# EAGLE board ludusProtoShieldWireless_Panel_v11 (EAGLE 7.3.0), part 1 of 2
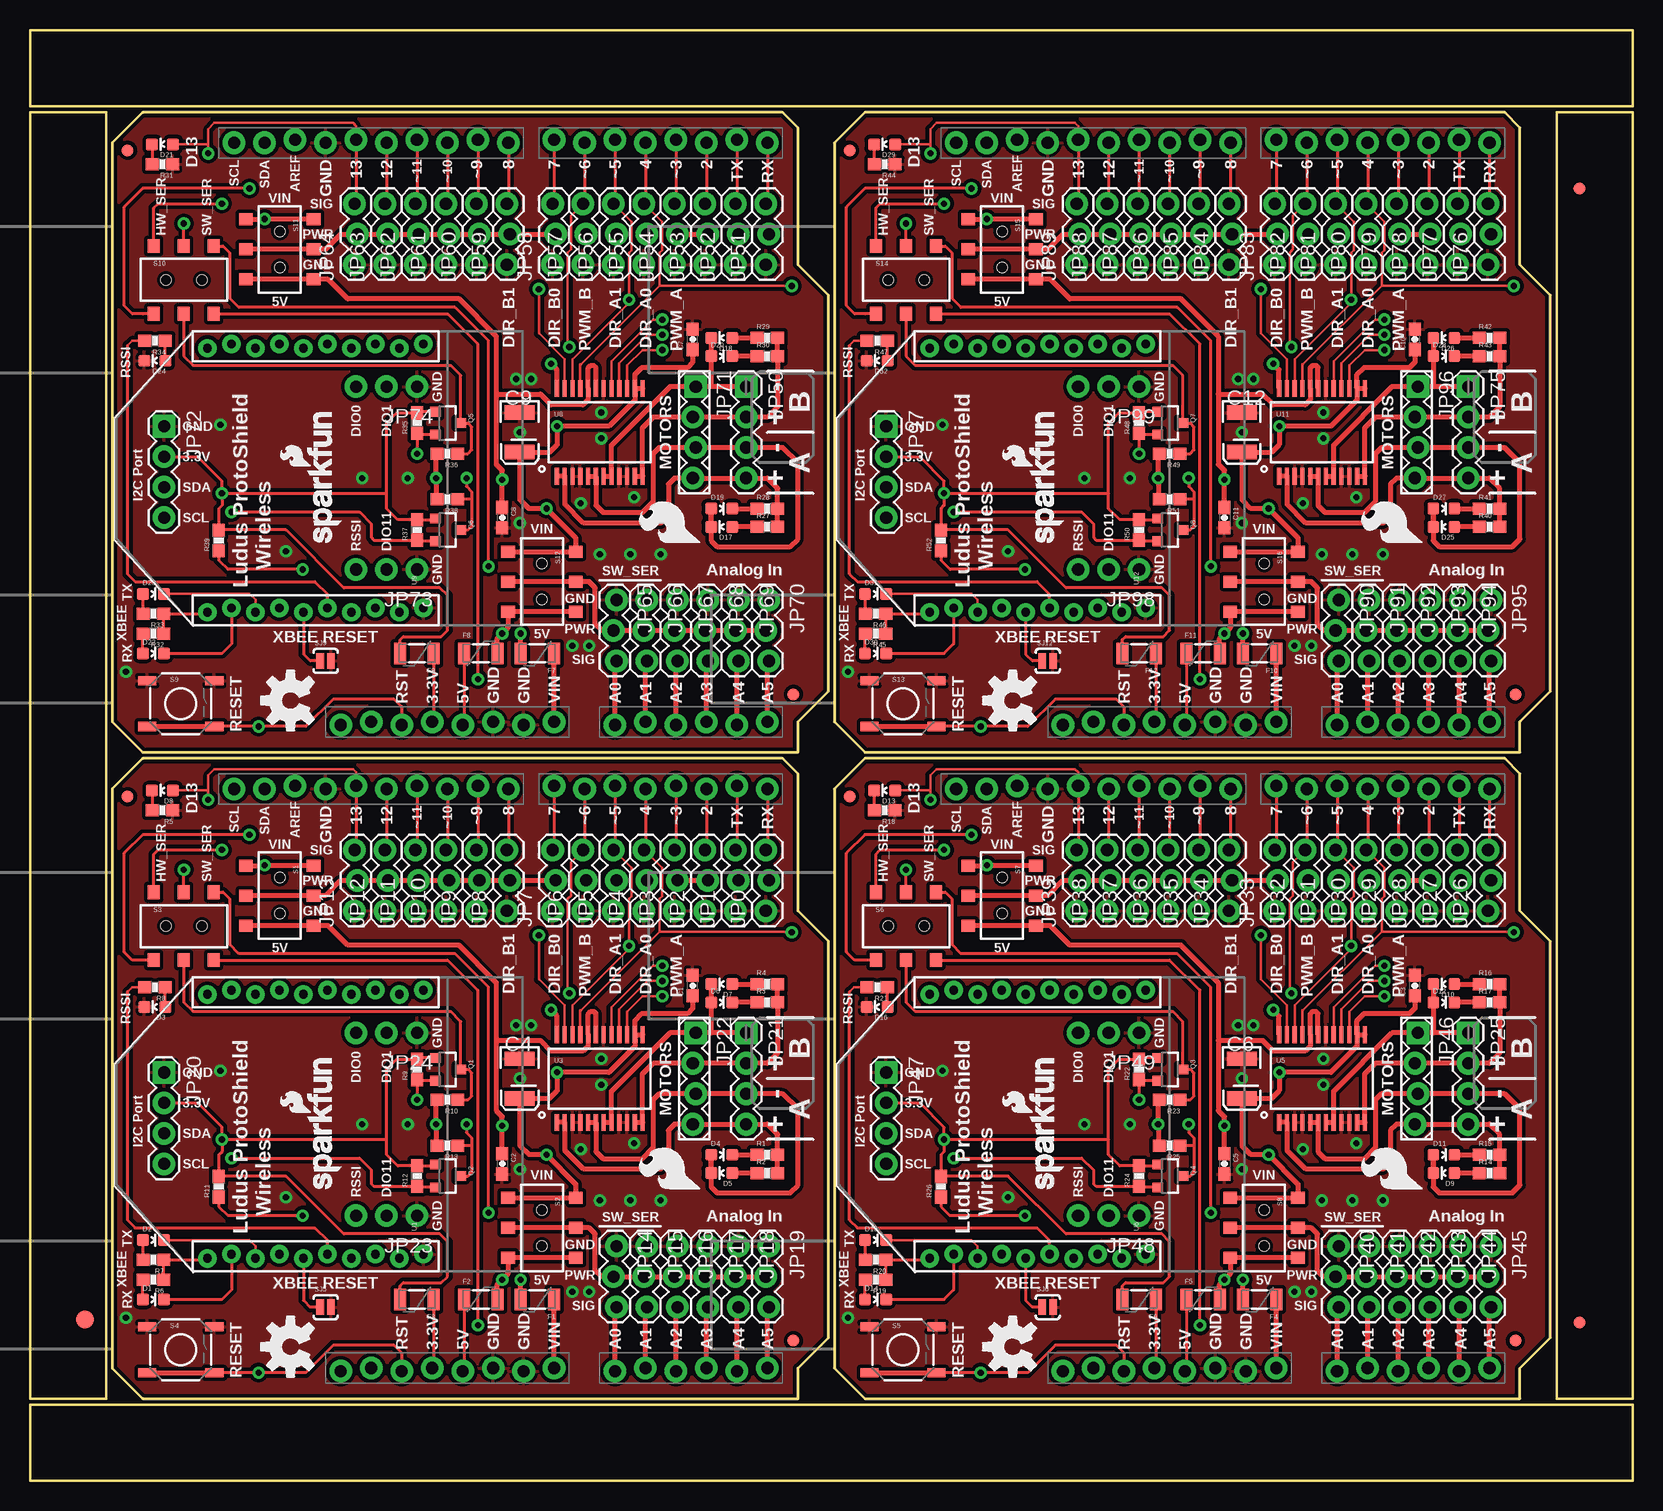
[diagram p0: board, top side]
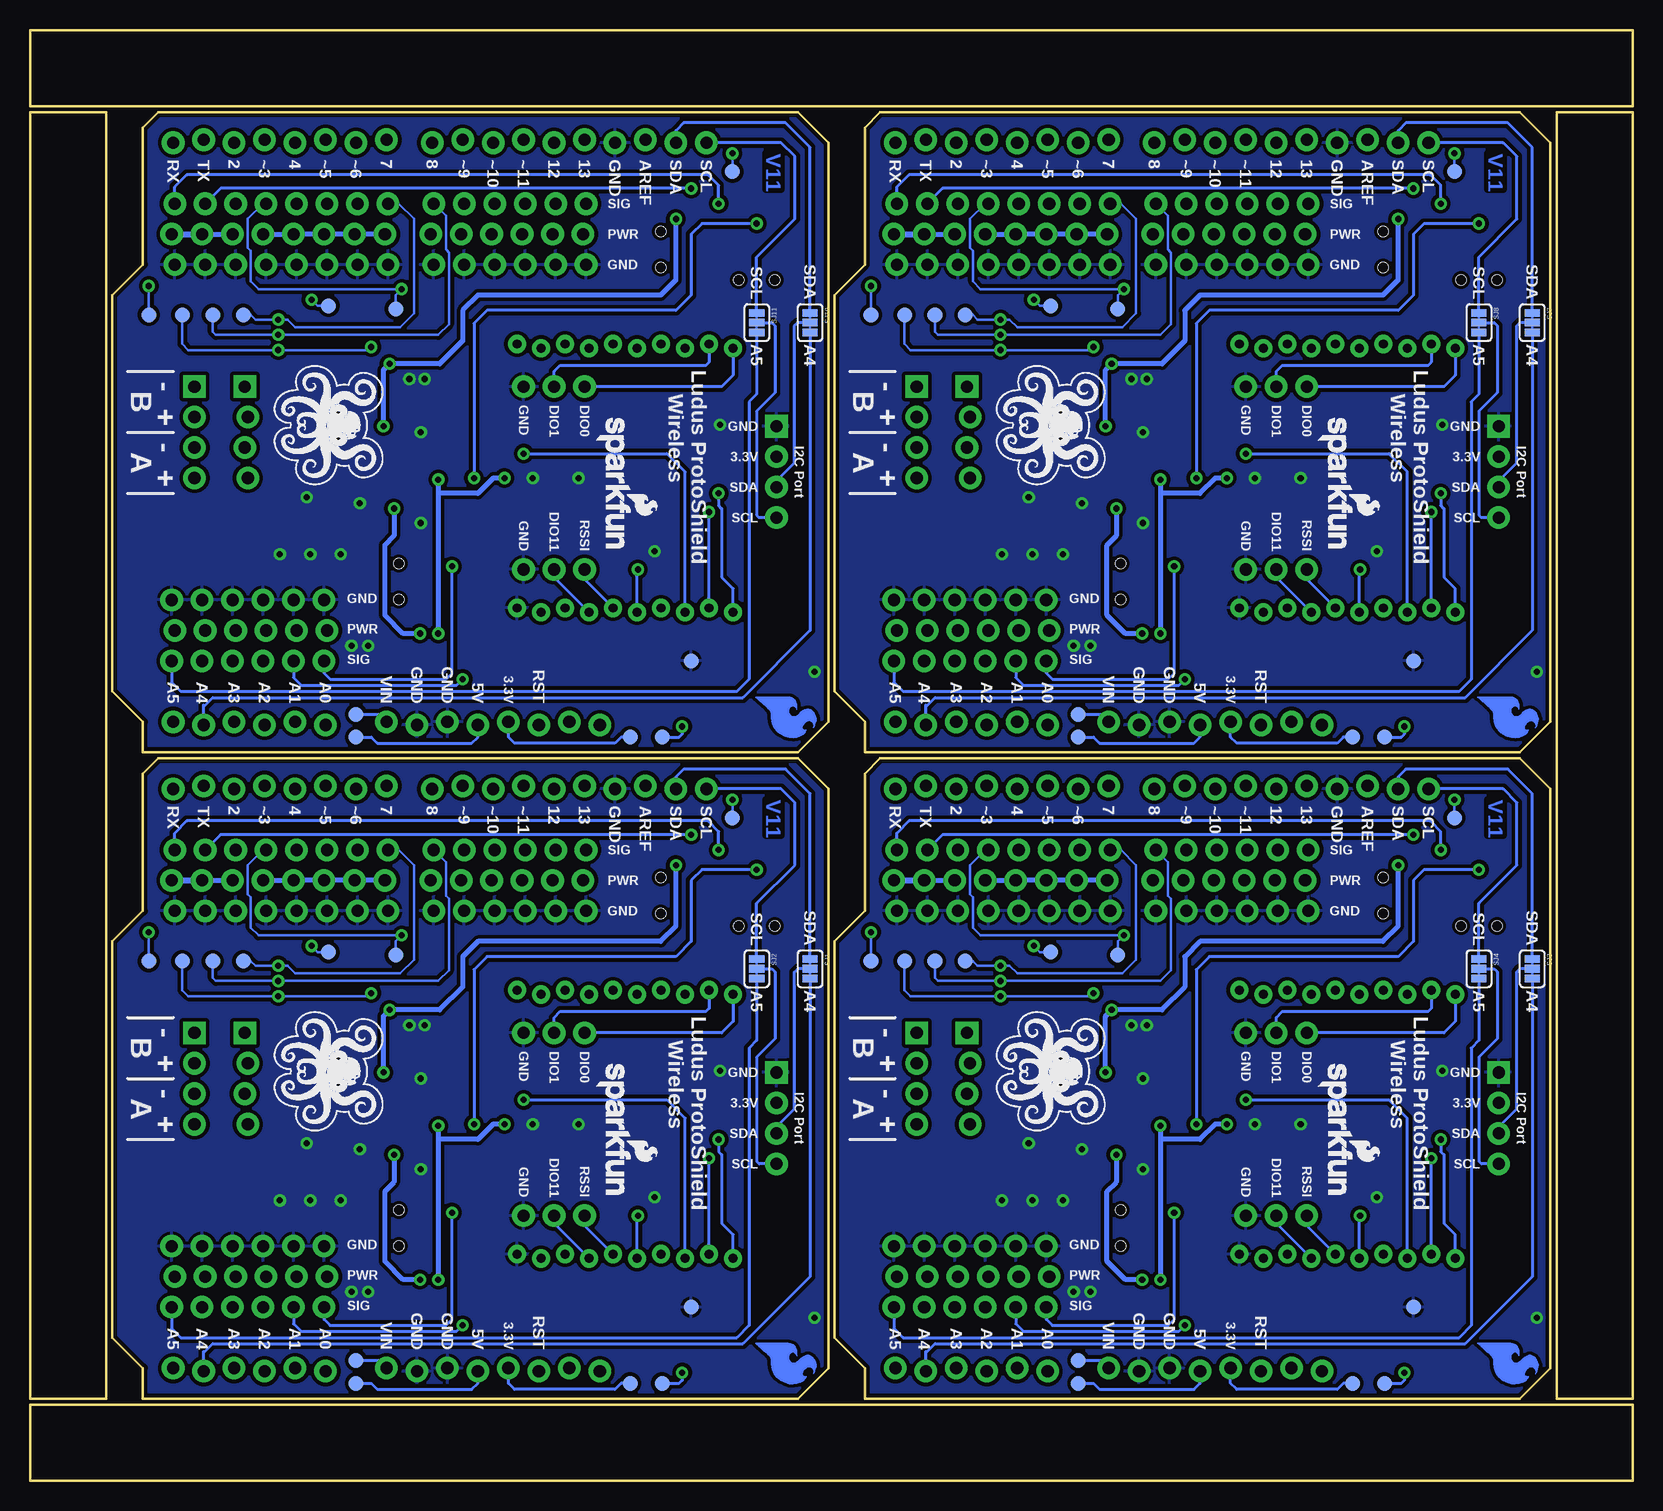
[diagram p1: board, bottom side, seen from below]

Size 133.6 x 120.9 mm. Coordinates in mm from the lower left corner, seen from the top.
Outline: 6.86,57.66 6.86,9.4 9.4,6.86 64.01,6.86 64.01,9.4 66.55,11.94 66.55,44.96 64.01,47.5 64.01,58.93 62.74,60.2 9.4,60.2 6.86,57.66
Outline: 67.06,57.66 67.06,9.4 69.6,6.86 124.21,6.86 124.21,9.4 126.75,11.94 126.75,44.96 124.21,47.5 124.21,58.93 122.94,60.2 69.6,60.2 67.06,57.66
Outline: 6.86,111.51 6.86,63.25 9.4,60.71 64.01,60.71 64.01,63.25 66.55,65.79 66.55,98.81 64.01,101.35 64.01,112.78 62.74,114.05 9.4,114.05 6.86,111.51
Outline: 67.06,111.51 67.06,63.25 69.6,60.71 124.21,60.71 124.21,63.25 126.75,65.79 126.75,98.81 124.21,101.35 124.21,112.78 122.94,114.05 69.6,114.05 67.06,111.51
Outline: 6.35,6.86 6.35,114.05 0,114.05 0,6.86 6.35,6.86
Outline: 0,0 133.6,0 133.6,6.35 0,6.35 0,0
Outline: 133.6,6.86 133.6,114.05 127.25,114.05 127.25,6.86 133.6,6.86
Outline: 133.6,120.9 0,120.9 0,114.55 133.6,114.55 133.6,120.9
Copper layers (1*16): Top 0.035mm / dielectric 1.5mm / Bottom 0.035mm
Design rules "SparkFun-2-layer": minimum track width 7mil, minimum drill 15mil, track to track 8mil, track to pad 8mil, pad to pad 8mil, via to via 8mil, smd to smd 8mil, copper to edge 8mil, drill to drill 8mil, minimum pad ring 12mil, minimum via ring 10mil, stop-mask expansion 4mil, vias tented up to drill 20mil, thermal gap 10mil
Net classes: 1 vcc: width 0.305 mm

## Footprints (pad centres in the part's own frame; a part is rotated, then mirrored left to right if it is on the bottom)
0603-CAP = smd 1.1 x 1: 1 -0.85,0; 2 0.85,0
EIA3528 = smd 1.2 x 2.5: A 1.65,0; C -1.65,0
LED-0603 = smd 1 x 1: A 0,-0.877; C 0,0.877
FIDUCIAL-1.5X3 = smd 1.5 x 1.5: 1 0,0
FIDUCIAL-1X2 = smd 1 x 1: 1 0,0
PTC-1206 = smd 1 x 1.8: 1 -1.4,0; 2 1.4,0
1X03_LOCK = drill 1.016 pad 1.88: 1 0,0.127; 2 2.54,-0.127; 3 5.08,0.127
1X04 = drill 1.016 pad 1.88 square: 1 0,0 | drill 1.016 pad 1.88: 2 2.54,0; 3 5.08,0; 4 7.62,0
1X04_LOCK = drill 1.016 pad 1.88 square: 1 0,0.127 | drill 1.016 pad 1.88: 2 2.54,-0.127; 3 5.08,0.127; 4 7.62,-0.127
1X03_NO_SILK = drill 1.016 pad 1.88: 1 0,0; 2 2.54,0; 3 5.08,0
SOT23-3 = smd 0.8 x 0.9: 1 -0.95,-1; 2 0.95,-1; 3 0,1.1
0603-RES = smd 1.1 x 1: 1 -0.85,0; 2 0.85,0
AYZ0202 = smd 1 x 1.15: 1 -2.5,2.825; 2 0,2.825; 3 2.5,2.825; 4 -2.5,-2.825; 5 0,-2.825; 6 2.5,-2.825 | hole 0.85: 1.5,0; -1.5,0
TACTILE-SWITCH-SMD = smd 1.524 x 0.762: 1 -2.794,1.905; 2 2.794,1.905; 3 -2.794,-1.905; 4 2.794,-1.905
PAD-JUMPER-3-3OF3_NC_BY_TRACE_YES_SILK_FULL_BOX = smd 0.635 x 1.27: 1 -0.813,0; 2 0,0; 3 0.813,0
SJ_2S-NO = smd 0.635 x 1.27: 1 -0.45,0; 2 0.45,0
PAD.03X.05 = smd 1.27 x 1.27: P$1 0,0
XBEE-1_LOCK = drill 0.737 pad 1.524: 1 -11.178,20; 2 -10.822,18; 3 -11.178,16; 4 -10.822,14; 5 -11.178,12; 6 -10.822,10; 7 -11.178,8; 8 -10.822,6; 9 -11.178,4; 10 -10.822,2; 11 11.178,2; 12 10.822,4; 13 11.178,6; 14 10.822,8; 15 11.178,10; 16 10.822,12; 17 11.178,14; 18 10.822,16; 19 11.178,18; 20 10.822,20
UNO_R3_SHIELD_NOLABELS_LOCK = drill 1.016 pad 1.88: 3.3V 50.8,26.67; 5V 51.054,29.21; A0 51.054,41.91; A1 50.8,44.45; A2 51.054,46.99; A3 50.8,49.53; A4 51.054,52.07; A5 50.8,54.61; AREF 2.286,15.24; D2 2.54,49.53; D3 2.286,46.99; D4 2.54,44.45; D5 2.286,41.91; D6 2.54,39.37; D7 2.286,36.83; D8 2.54,33.02; D9 2.286,30.48; D10 2.54,27.94; D11 2.286,25.4; D12 2.54,22.86; D13 2.286,20.32; GND@0 50.8,31.75; GND@1 51.054,34.29; GND@2 2.54,17.78; IOREF 50.8,21.59; NC 51.054,19.05; RES 51.054,24.13; RX 2.54,54.61; SCL 2.54,10.16; SDA 2.54,12.7; TX 2.286,52.07; VIN 50.8,36.83
SSOP24 = smd 0.348 x 1.397: 1 -3.575,-3.656; 2 -2.925,-3.656; 3 -2.275,-3.656; 4 -1.625,-3.656; 5 -0.975,-3.656; 6 -0.325,-3.656; 7 0.325,-3.656; 8 0.975,-3.656; 9 1.625,-3.656; 10 2.275,-3.656; 11 2.925,-3.656; 12 3.575,-3.656; 13 3.575,3.656; 14 2.925,3.656; 15 2.275,3.656; 16 1.625,3.656; 17 0.975,3.656; 18 0.325,3.656; 19 -0.325,3.656; 20 -0.975,3.656; 21 -1.625,3.656; 22 -2.275,3.656; 23 -2.925,3.656; 24 -3.575,3.656

## Placement (x,y rotation side)
C1  0.1uF  [0603-CAP]  55.24,41.27 90 top
C2  0.1uF  [0603-CAP]  39.37,26.42 270 top
C3  0.1uF  [0603-CAP]  115.44,41.27 90 top
C4  10uf , 20V  [EIA3528]  40.83,33.53 270 top
C5  0.1uF  [0603-CAP]  99.57,26.42 270 top
C6  10uf , 20V  [EIA3528]  101.03,33.53 270 top
C7  0.1uF  [0603-CAP]  55.24,95.12 90 top
C8  0.1uF  [0603-CAP]  39.37,80.26 270 top
C9  10uf , 20V  [EIA3528]  40.83,87.38 270 top
C10  0.1uF  [0603-CAP]  115.44,95.12 90 top
C11  0.1uF  [0603-CAP]  99.57,80.26 270 top
C12  10uf , 20V  [EIA3528]  101.03,87.38 270 top
D1  Red  [LED-0603]  10.29,15.11 270 top
D2  Green  [LED-0603]  10.29,20.07 270 top
D3  Yellow  [LED-0603]  10.41,39.5 90 top
D4  Blue  [LED-0603]  57.66,27.18 270 top
D5  Yellow  [LED-0603]  57.66,25.65 90 top
D6  Blue  [LED-0603]  57.66,39.88 270 top
D7  Yellow  [LED-0603]  57.66,41.4 90 top
D8  Blue  [LED-0603]  11.05,57.53 90 top
D9  Yellow  [LED-0603]  117.86,25.65 90 top
D10  Yellow  [LED-0603]  117.86,41.4 90 top
D11  Blue  [LED-0603]  117.86,27.18 270 top
D12  Blue  [LED-0603]  117.86,39.88 270 top
D13  Blue  [LED-0603]  71.25,57.53 90 top
D14  Red  [LED-0603]  70.48,15.11 270 top
D15  Green  [LED-0603]  70.48,20.07 270 top
D16  Yellow  [LED-0603]  70.61,39.5 90 top
D17  Yellow  [LED-0603]  57.66,79.5 90 top
D18  Yellow  [LED-0603]  57.66,95.25 90 top
D19  Blue  [LED-0603]  57.66,81.03 270 top
D20  Blue  [LED-0603]  57.66,93.73 270 top
D21  Blue  [LED-0603]  11.05,111.38 90 top
D22  Red  [LED-0603]  10.29,68.96 270 top
D23  Green  [LED-0603]  10.29,73.91 270 top
D24  Yellow  [LED-0603]  10.41,93.34 90 top
D25  Yellow  [LED-0603]  117.86,79.5 90 top
D26  Yellow  [LED-0603]  117.86,95.25 90 top
D27  Blue  [LED-0603]  117.86,81.03 270 top
D28  Blue  [LED-0603]  117.86,93.73 270 top
D29  Blue  [LED-0603]  71.25,111.38 90 top
D30  Red  [LED-0603]  70.48,68.96 270 top
D31  Green  [LED-0603]  70.48,73.91 270 top
D32  Yellow  [LED-0603]  70.61,93.34 90 top
E$1  [FIDUCIAL-1.5X3]  4.57,13.46 0 top
E$4  [FIDUCIAL-1X2]  129.16,13.21 0 top
E$5  [FIDUCIAL-1X2]  129.16,107.7 180 top
F1  [PTC-1206]  42.29,15.11 180 top
F2  [PTC-1206]  37.59,15.11 0 top
F3  [PTC-1206]  32.26,15.11 180 top
F4  [PTC-1206]  102.49,15.11 180 top
F5  [PTC-1206]  97.79,15.11 0 top
F6  [PTC-1206]  92.46,15.11 180 top
F7  [PTC-1206]  42.29,68.96 180 top
F8  [PTC-1206]  37.59,68.96 0 top
F9  [PTC-1206]  32.26,68.96 180 top
F10  [PTC-1206]  102.49,68.96 180 top
F11  [PTC-1206]  97.79,68.96 0 top
F12  [PTC-1206]  92.46,68.96 180 top
FID1  FIDUCIAL1X2  [FIDUCIAL-1X2]  8.13,57.02 0 top
FID2  FIDUCIAL1X2  [FIDUCIAL-1X2]  63.63,11.68 0 top
FID3  FIDUCIAL1X2  [FIDUCIAL-1X2]  68.33,57.02 0 top
FID4  FIDUCIAL1X2  [FIDUCIAL-1X2]  123.83,11.68 0 top
FID5  FIDUCIAL1X2  [FIDUCIAL-1X2]  8.13,110.87 0 top
FID6  FIDUCIAL1X2  [FIDUCIAL-1X2]  63.63,65.53 0 top
FID7  FIDUCIAL1X2  [FIDUCIAL-1X2]  68.33,110.87 0 top
FID8  FIDUCIAL1X2  [FIDUCIAL-1X2]  123.83,65.53 0 top
JP0  D0  [1X03_LOCK]  61.47,47.5 90 top
JP1  D1  [1X03_LOCK]  58.93,47.5 90 top
JP2  D2  [1X03_LOCK]  56.39,47.5 90 top
JP3  D3  [1X03_LOCK]  53.85,47.5 90 top
JP4  D4  [1X03_LOCK]  51.31,47.5 90 top
JP5  D5  [1X03_LOCK]  48.77,47.5 90 top
JP6  D6  [1X03_LOCK]  46.23,47.5 90 top
JP7  D7  [1X03_LOCK]  43.69,47.5 90 top
JP8  D8  [1X03_LOCK]  39.88,47.5 90 top
JP9  D9  [1X03_LOCK]  37.34,47.5 90 top
JP10  D10  [1X03_LOCK]  34.8,47.5 90 top
JP11  D11  [1X03_LOCK]  32.26,47.5 90 top
JP12  D12  [1X03_LOCK]  29.72,47.5 90 top
JP13  D13  [1X03_LOCK]  27.18,47.5 90 top
JP14  A0  [1X03_LOCK]  48.77,19.56 270 top
JP15  A1  [1X03_LOCK]  51.31,19.56 270 top
JP16  A2  [1X03_LOCK]  53.85,19.56 270 top
JP17  A3  [1X03_LOCK]  56.39,19.56 270 top
JP18  A4  [1X03_LOCK]  58.93,19.56 270 top
JP19  A5  [1X03_LOCK]  61.47,19.56 270 top
JP20  [1X04]  11.18,34.04 270 top
JP21  [1X04]  59.69,37.34 270 top
JP22  [1X04_LOCK]  55.37,37.34 270 top
JP23  [1X03_NO_SILK]  32.26,22.1 180 top
JP24  [1X03_NO_SILK]  32.26,37.34 180 top
JP25  [1X04]  119.89,37.34 270 top
JP26  D0  [1X03_LOCK]  121.67,47.5 90 top
JP27  D1  [1X03_LOCK]  119.13,47.5 90 top
JP28  D2  [1X03_LOCK]  116.59,47.5 90 top
JP29  D3  [1X03_LOCK]  114.05,47.5 90 top
JP30  D4  [1X03_LOCK]  111.51,47.5 90 top
JP31  D5  [1X03_LOCK]  108.97,47.5 90 top
JP32  D6  [1X03_LOCK]  106.43,47.5 90 top
JP33  D7  [1X03_LOCK]  103.89,47.5 90 top
JP34  D8  [1X03_LOCK]  100.08,47.5 90 top
JP35  D9  [1X03_LOCK]  97.54,47.5 90 top
JP36  D10  [1X03_LOCK]  95,47.5 90 top
JP37  D11  [1X03_LOCK]  92.46,47.5 90 top
JP38  D12  [1X03_LOCK]  89.92,47.5 90 top
JP39  D13  [1X03_LOCK]  87.38,47.5 90 top
JP40  A0  [1X03_LOCK]  108.97,19.56 270 top
JP41  A1  [1X03_LOCK]  111.51,19.56 270 top
JP42  A2  [1X03_LOCK]  114.05,19.56 270 top
JP43  A3  [1X03_LOCK]  116.59,19.56 270 top
JP44  A4  [1X03_LOCK]  119.13,19.56 270 top
JP45  A5  [1X03_LOCK]  121.67,19.56 270 top
JP46  [1X04_LOCK]  115.57,37.34 270 top
JP47  [1X04]  71.37,34.04 270 top
JP48  [1X03_NO_SILK]  92.46,22.1 180 top
JP49  [1X03_NO_SILK]  92.46,37.34 180 top
JP50  [1X04]  59.69,91.19 270 top
JP51  D0  [1X03_LOCK]  61.47,101.35 90 top
JP52  D1  [1X03_LOCK]  58.93,101.35 90 top
JP53  D2  [1X03_LOCK]  56.39,101.35 90 top
JP54  D3  [1X03_LOCK]  53.85,101.35 90 top
JP55  D4  [1X03_LOCK]  51.31,101.35 90 top
JP56  D5  [1X03_LOCK]  48.77,101.35 90 top
JP57  D6  [1X03_LOCK]  46.23,101.35 90 top
JP58  D7  [1X03_LOCK]  43.69,101.35 90 top
JP59  D8  [1X03_LOCK]  39.88,101.35 90 top
JP60  D9  [1X03_LOCK]  37.34,101.35 90 top
JP61  D10  [1X03_LOCK]  34.8,101.35 90 top
JP62  D11  [1X03_LOCK]  32.26,101.35 90 top
JP63  D12  [1X03_LOCK]  29.72,101.35 90 top
JP64  D13  [1X03_LOCK]  27.18,101.35 90 top
JP65  A0  [1X03_LOCK]  48.77,73.41 270 top
JP66  A1  [1X03_LOCK]  51.31,73.41 270 top
JP67  A2  [1X03_LOCK]  53.85,73.41 270 top
JP68  A3  [1X03_LOCK]  56.39,73.41 270 top
JP69  A4  [1X03_LOCK]  58.93,73.41 270 top
JP70  A5  [1X03_LOCK]  61.47,73.41 270 top
JP71  [1X04_LOCK]  55.37,91.19 270 top
JP72  [1X04]  11.18,87.88 270 top
JP73  [1X03_NO_SILK]  32.26,75.95 180 top
JP74  [1X03_NO_SILK]  32.26,91.19 180 top
JP75  [1X04]  119.89,91.19 270 top
JP76  D0  [1X03_LOCK]  121.67,101.35 90 top
JP77  D1  [1X03_LOCK]  119.13,101.35 90 top
JP78  D2  [1X03_LOCK]  116.59,101.35 90 top
JP79  D3  [1X03_LOCK]  114.05,101.35 90 top
JP80  D4  [1X03_LOCK]  111.51,101.35 90 top
JP81  D5  [1X03_LOCK]  108.97,101.35 90 top
JP82  D6  [1X03_LOCK]  106.43,101.35 90 top
JP83  D7  [1X03_LOCK]  103.89,101.35 90 top
JP84  D8  [1X03_LOCK]  100.08,101.35 90 top
JP85  D9  [1X03_LOCK]  97.54,101.35 90 top
JP86  D10  [1X03_LOCK]  95,101.35 90 top
JP87  D11  [1X03_LOCK]  92.46,101.35 90 top
JP88  D12  [1X03_LOCK]  89.92,101.35 90 top
JP89  D13  [1X03_LOCK]  87.38,101.35 90 top
JP90  A0  [1X03_LOCK]  108.97,73.41 270 top
JP91  A1  [1X03_LOCK]  111.51,73.41 270 top
JP92  A2  [1X03_LOCK]  114.05,73.41 270 top
JP93  A3  [1X03_LOCK]  116.59,73.41 270 top
JP94  A4  [1X03_LOCK]  119.13,73.41 270 top
JP95  A5  [1X03_LOCK]  121.67,73.41 270 top
JP96  [1X04_LOCK]  115.57,91.19 270 top
JP97  [1X04]  71.37,87.88 270 top
JP98  [1X03_NO_SILK]  92.46,75.95 180 top
JP99  [1X03_NO_SILK]  92.46,91.19 180 top
LOGO1  OSHW-LOGOM  [OSHW-LOGO-M]  21.72,11.18 90 top
LOGO2  SFE_LOGO_NAME_FLAME.1_INCH  [SFE_LOGO_NAME_FLAME_.1]  26.04,23.88 90 top
LOGO3  SFE_LOGO_FLAME.2_INCH  [SFE_LOGO_FLAME_.2]  56.13,24 90 top
LOGO4  SFE_LOGO_NAME_FLAME.1_INCH  [SFE_LOGO_NAME_FLAME_.1]  26.29,35.18 270 bottom
LOGO5  SFE_LOGO_FLAME.2COP  [SFE_LOGO_FLAME_COPPER_.2]  13.21,11.81 270 bottom
LOGO6  OSHW-LOGOM  [OSHW-LOGO-M]  81.92,11.18 90 top
LOGO7  SFE_LOGO_NAME_FLAME.1_INCH  [SFE_LOGO_NAME_FLAME_.1]  86.23,23.88 90 top
LOGO8  SFE_LOGO_FLAME.2_INCH  [SFE_LOGO_FLAME_.2]  116.33,24 90 top
LOGO9  SFE_LOGO_NAME_FLAME.1_INCH  [SFE_LOGO_NAME_FLAME_.1]  86.49,35.18 270 bottom
LOGO10  SFE_LOGO_FLAME.2COP  [SFE_LOGO_FLAME_COPPER_.2]  73.41,11.81 270 bottom
LOGO11  OSHW-LOGOM  [OSHW-LOGO-M]  21.72,65.02 90 top
LOGO12  SFE_LOGO_NAME_FLAME.1_INCH  [SFE_LOGO_NAME_FLAME_.1]  26.04,77.72 90 top
LOGO13  SFE_LOGO_FLAME.2_INCH  [SFE_LOGO_FLAME_.2]  56.13,77.85 90 top
LOGO14  SFE_LOGO_NAME_FLAME.1_INCH  [SFE_LOGO_NAME_FLAME_.1]  26.29,89.03 270 bottom
LOGO15  SFE_LOGO_FLAME.2COP  [SFE_LOGO_FLAME_COPPER_.2]  13.21,65.66 270 bottom
LOGO16  OSHW-LOGOM  [OSHW-LOGO-M]  81.92,65.02 90 top
LOGO17  SFE_LOGO_NAME_FLAME.1_INCH  [SFE_LOGO_NAME_FLAME_.1]  86.23,77.72 90 top
LOGO18  SFE_LOGO_FLAME.2_INCH  [SFE_LOGO_FLAME_.2]  116.33,77.85 90 top
LOGO19  SFE_LOGO_NAME_FLAME.1_INCH  [SFE_LOGO_NAME_FLAME_.1]  86.49,89.03 270 bottom
LOGO20  SFE_LOGO_FLAME.2COP  [SFE_LOGO_FLAME_COPPER_.2]  73.41,65.66 270 bottom
Q1  MOSFET-NCHANNELBSS138  [SOT23-3]  34.8,34.29 270 top
Q2  MOSFET-NCHANNELBSS138  [SOT23-3]  34.8,25.4 270 top
Q3  MOSFET-NCHANNELBSS138  [SOT23-3]  95,34.29 270 top
Q4  MOSFET-NCHANNELBSS138  [SOT23-3]  95,25.4 270 top
Q5  MOSFET-NCHANNELBSS138  [SOT23-3]  34.8,88.14 270 top
Q6  MOSFET-NCHANNELBSS138  [SOT23-3]  34.8,79.25 270 top
Q7  MOSFET-NCHANNELBSS138  [SOT23-3]  95,88.14 270 top
Q8  MOSFET-NCHANNELBSS138  [SOT23-3]  95,79.25 270 top
R1  1K  [0603-RES]  61.47,27.18 0 top
R2  1K  [0603-RES]  61.47,25.65 0 top
R3  1K  [0603-RES]  61.47,39.88 0 top
R4  1K  [0603-RES]  61.47,41.4 0 top
R5  330  [0603-RES]  11.05,55.88 180 top
R6  1K  [0603-RES]  10.29,16.76 180 top
R7  1K  [0603-RES]  10.29,18.41 180 top
R8  1K  [0603-RES]  10.41,41.15 180 top
R9  1K  [0603-RES]  32.26,34.29 90 top
R10  1K  [0603-RES]  34.8,31.75 180 top
R11  1K  [0603-RES]  15.75,24.51 90 top
R12  1K  [0603-RES]  32.26,25.4 90 top
R13  1K  [0603-RES]  34.8,27.94 180 top
R14  1K  [0603-RES]  121.67,25.65 0 top
R15  1K  [0603-RES]  121.67,27.18 0 top
R16  1K  [0603-RES]  121.67,41.4 0 top
R17  1K  [0603-RES]  121.67,39.88 0 top
R18  330  [0603-RES]  71.25,55.88 180 top
R19  1K  [0603-RES]  70.48,16.76 180 top
R20  1K  [0603-RES]  70.48,18.41 180 top
R21  1K  [0603-RES]  70.61,41.15 180 top
R22  1K  [0603-RES]  92.46,34.29 90 top
R23  1K  [0603-RES]  95,31.75 180 top
R24  1K  [0603-RES]  92.46,25.4 90 top
R25  1K  [0603-RES]  95,27.94 180 top
R26  1K  [0603-RES]  75.95,24.51 90 top
R27  1K  [0603-RES]  61.47,79.5 0 top
R28  1K  [0603-RES]  61.47,81.03 0 top
R29  1K  [0603-RES]  61.47,95.25 0 top
R30  1K  [0603-RES]  61.47,93.73 0 top
R31  330  [0603-RES]  11.05,109.73 180 top
R32  1K  [0603-RES]  10.29,70.61 180 top
R33  1K  [0603-RES]  10.29,72.26 180 top
R34  1K  [0603-RES]  10.41,95 180 top
R35  1K  [0603-RES]  32.26,88.14 90 top
R36  1K  [0603-RES]  34.8,85.6 180 top
R37  1K  [0603-RES]  32.26,79.25 90 top
R38  1K  [0603-RES]  34.8,81.79 180 top
R39  1K  [0603-RES]  15.75,78.36 90 top
R40  1K  [0603-RES]  121.67,79.5 0 top
R41  1K  [0603-RES]  121.67,81.03 0 top
R42  1K  [0603-RES]  121.67,95.25 0 top
R43  1K  [0603-RES]  121.67,93.73 0 top
R44  330  [0603-RES]  71.25,109.73 180 top
R45  1K  [0603-RES]  70.48,70.61 180 top
R46  1K  [0603-RES]  70.48,72.26 180 top
R47  1K  [0603-RES]  70.61,95 180 top
R48  1K  [0603-RES]  92.46,88.14 90 top
R49  1K  [0603-RES]  95,85.6 180 top
R50  1K  [0603-RES]  92.46,79.25 90 top
R51  1K  [0603-RES]  95,81.79 180 top
R52  1K  [0603-RES]  75.95,78.36 90 top
S1  [AYZ0202]  20.83,48.77 270 top
S2  [AYZ0202]  42.67,21.08 270 top
S3  DPDT  [AYZ0202]  12.83,46.23 0 top
S4  RESET  [TACTILE-SWITCH-SMD]  12.57,10.92 0 top
S5  RESET  [TACTILE-SWITCH-SMD]  72.77,10.92 0 top
S6  DPDT  [AYZ0202]  73.03,46.23 0 top
S7  [AYZ0202]  81.03,48.77 270 top
S8  [AYZ0202]  102.87,21.08 270 top
S9  RESET  [TACTILE-SWITCH-SMD]  12.57,64.77 0 top
S10  DPDT  [AYZ0202]  12.83,100.08 0 top
S11  [AYZ0202]  20.83,102.62 270 top
S12  [AYZ0202]  42.67,74.93 270 top
S13  RESET  [TACTILE-SWITCH-SMD]  72.77,64.77 0 top
S14  DPDT  [AYZ0202]  73.03,100.08 0 top
S15  [AYZ0202]  81.03,102.62 270 top
S16  [AYZ0202]  102.87,74.93 270 top
SJ1  [PAD-JUMPER-3-3OF3_NC_BY_TRACE_YES_SILK_FULL_BOX]  68.58,42.67 270 bottom
SJ2  [PAD-JUMPER-3-3OF3_NC_BY_TRACE_YES_SILK_FULL_BOX]  73.03,42.67 270 bottom
SJ3  [PAD-JUMPER-3-3OF3_NC_BY_TRACE_YES_SILK_FULL_BOX]  8.38,42.67 270 bottom
SJ4  [PAD-JUMPER-3-3OF3_NC_BY_TRACE_YES_SILK_FULL_BOX]  12.83,42.67 270 bottom
SJ5  [SJ_2S-NO]  24.64,14.48 0 top
SJ6  [SJ_2S-NO]  84.84,14.48 0 top
SJ7  [PAD-JUMPER-3-3OF3_NC_BY_TRACE_YES_SILK_FULL_BOX]  8.38,96.52 270 bottom
SJ8  [PAD-JUMPER-3-3OF3_NC_BY_TRACE_YES_SILK_FULL_BOX]  12.83,96.52 270 bottom
SJ9  [SJ_2S-NO]  24.64,68.33 0 top
SJ10  [PAD-JUMPER-3-3OF3_NC_BY_TRACE_YES_SILK_FULL_BOX]  68.58,96.52 270 bottom
SJ11  [PAD-JUMPER-3-3OF3_NC_BY_TRACE_YES_SILK_FULL_BOX]  73.03,96.52 270 bottom
SJ12  [SJ_2S-NO]  84.84,68.33 0 top
TP1  [PAD.03X.05]  63.5,43.31 90 bottom
TP2  [PAD.03X.05]  48.51,44.07 90 bottom
TP3  [PAD.03X.05]  42.93,43.81 90 bottom
TP4  [PAD.03X.05]  55.63,43.31 90 bottom
TP5  [PAD.03X.05]  58.17,43.31 90 bottom
TP6  [PAD.03X.05]  60.71,43.31 180 bottom
TP7  [PAD.03X.05]  14.86,55.24 180 bottom
TP8  [PAD.03X.05]  46.23,8.13 90 bottom
TP9  [PAD.03X.05]  18.29,14.48 0 bottom
TP10  [PAD.03X.05]  46.23,10.03 0 bottom
TP11  [PAD.03X.05]  23.37,8.13 0 bottom
TP12  [PAD.03X.05]  20.7,8.13 0 bottom
TP13  [PAD.03X.05]  123.7,43.31 90 bottom
TP14  [PAD.03X.05]  108.71,44.07 90 bottom
TP15  [PAD.03X.05]  103.12,43.81 90 bottom
TP16  [PAD.03X.05]  115.82,43.31 90 bottom
TP17  [PAD.03X.05]  118.36,43.31 90 bottom
TP18  [PAD.03X.05]  120.9,43.31 180 bottom
TP19  [PAD.03X.05]  75.06,55.24 180 bottom
TP20  [PAD.03X.05]  106.43,8.13 90 bottom
TP21  [PAD.03X.05]  78.49,14.48 0 bottom
TP22  [PAD.03X.05]  106.43,10.03 0 bottom
TP23  [PAD.03X.05]  83.57,8.13 0 bottom
TP24  [PAD.03X.05]  80.9,8.13 0 bottom
TP25  [PAD.03X.05]  63.5,97.16 90 bottom
TP26  [PAD.03X.05]  48.51,97.92 90 bottom
TP27  [PAD.03X.05]  42.93,97.66 90 bottom
TP28  [PAD.03X.05]  55.63,97.16 90 bottom
TP29  [PAD.03X.05]  58.17,97.16 90 bottom
TP30  [PAD.03X.05]  60.71,97.16 180 bottom
TP31  [PAD.03X.05]  14.86,109.09 180 bottom
TP32  [PAD.03X.05]  46.23,61.98 90 bottom
TP33  [PAD.03X.05]  18.29,68.33 0 bottom
TP34  [PAD.03X.05]  46.23,63.88 0 bottom
TP35  [PAD.03X.05]  23.37,61.98 0 bottom
TP36  [PAD.03X.05]  20.7,61.98 0 bottom
TP37  [PAD.03X.05]  123.7,97.16 90 bottom
TP38  [PAD.03X.05]  108.71,97.92 90 bottom
TP39  [PAD.03X.05]  103.12,97.66 90 bottom
TP40  [PAD.03X.05]  115.82,97.16 90 bottom
TP41  [PAD.03X.05]  118.36,97.16 90 bottom
TP42  [PAD.03X.05]  120.9,97.16 180 bottom
TP43  [PAD.03X.05]  75.06,109.09 180 bottom
TP44  [PAD.03X.05]  106.43,61.98 90 bottom
TP45  [PAD.03X.05]  78.49,68.33 0 bottom
TP46  [PAD.03X.05]  106.43,63.88 0 bottom
TP47  [PAD.03X.05]  83.57,61.98 0 bottom
TP48  [PAD.03X.05]  80.9,61.98 0 bottom
U1  XBEE-1XBEE-1_LOCK  [XBEE-1_LOCK]  34.8,29.72 90 top
U2  ARDUINO  [UNO_R3_SHIELD_NOLABELS_LOCK]  6.86,60.2 270 top
U3  TB6612FNG  [SSOP24]  47.5,33.53 0 top
U4  ARDUINO  [UNO_R3_SHIELD_NOLABELS_LOCK]  67.06,60.2 270 top
U5  TB6612FNG  [SSOP24]  107.7,33.53 0 top
U6  XBEE-1XBEE-1_LOCK  [XBEE-1_LOCK]  95,29.72 90 top
U7  ARDUINO  [UNO_R3_SHIELD_NOLABELS_LOCK]  6.86,114.05 270 top
U8  TB6612FNG  [SSOP24]  47.5,87.38 0 top
U9  XBEE-1XBEE-1_LOCK  [XBEE-1_LOCK]  34.8,83.57 90 top
U10  ARDUINO  [UNO_R3_SHIELD_NOLABELS_LOCK]  67.06,114.05 270 top
U11  TB6612FNG  [SSOP24]  107.7,87.38 0 top
U12  XBEE-1XBEE-1_LOCK  [XBEE-1_LOCK]  95,83.57 90 top
U$1  SFE_LUDUSSFE_LUDUS-M  [SFE_LUDUS-M]  48.64,34.04 270 bottom
U$2  SFE_LUDUSSFE_LUDUS-M  [SFE_LUDUS-M]  108.84,34.04 270 bottom
U$3  SFE_LUDUSSFE_LUDUS-M  [SFE_LUDUS-M]  48.64,87.88 270 bottom
U$4  SFE_LUDUSSFE_LUDUS-M  [SFE_LUDUS-M]  108.84,87.88 270 bottom

## Library data of the parts
C1-C3 C5 C7 C8 C10 C11 = SparkFun-Capacitors; PROD_ID: CAP-08604
C4 C6 C9 C12 = SparkFun-Capacitors; PROD_ID: CAP-08063
D1 D14 D22 D30 = SparkFun-LED; PROD_ID: DIO-00819
D2 D15 D23 D31 = SparkFun-LED; PROD_ID: DIO-00821
D3 D5 D7 D9 D10 D16-D18 D24-D26 D32 = SparkFun-LED; PROD_ID: DIO-09003
D4 D6 D11 D12 D19 D20 D27 D28 = SparkFun-LED; PROD_ID: DIO-08575; VALUE: BLUE
D8 D13 D21 D29 = SparkFun-LED; PROD_ID: DIO-08575
E$1 SJ5 SJ6 SJ9 SJ12 = SparkFun-Retired
E$4 E$5 FID1-FID8 LOGO1-LOGO20 U$1-U$4 = SparkFun-Aesthetics
F1-F12 = SparkFun-PowerIC; PROD_ID: RES-11150
JP0 JP1-JP99 = SparkFun-Connectors
Q1-Q8 = SparkFun-DiscreteSemi; PROD_ID: TRANS-00830
R1-R4 R6-R17 R19-R30 R32-R43 R45-R52 = SparkFun-Resistors; PROD_ID: RES-07856
R5 R18 R31 R44 = SparkFun-Resistors; PROD_ID: RES-00818
S1-S3 S6-S8 S10-S12 S14-S16 = SparkFun-Electromechanical; PROD_ID: SWCH-08179
S4 S5 S9 S13 = SparkFun-Electromechanical; PROD_ID: SWCH-08247
SJ1-SJ4 SJ7 SJ8 SJ10 SJ11 TP1-TP48 = SparkFun-Passives
U1 U6 U9 U12 = SparkFun-RF
U2 U4 U7 U10 = SparkFun-Boards
U3 U5 U8 U11 = SparkFun-PowerIC; PROD_ID: IC-09363

## Nets
3.3V: F3.1 TP11.P$1 U2.3.3V
3.3V1: F6.1 TP23.P$1 U4.3.3V
3.3V2: F9.1 TP35.P$1 U7.3.3V
3.3V3: F12.1 TP47.P$1 U10.3.3V
5V: F2.1 TP8.P$1 U2.5V
5V1: F5.1 TP20.P$1 U4.5V
5V2: F8.1 TP32.P$1 U7.5V
5V3: F11.1 TP44.P$1 U10.5V
A0/SW_RXI: JP14.3 S3.3 U2.A0
A0/SW_RXI1: JP40.3 S6.3 U4.A0
A0/SW_RXI2: JP65.3 S10.3 U7.A0
A0/SW_RXI3: JP90.3 S14.3 U10.A0
A1: JP45.3 SJ2.3 U4.A5
A1/SW_TXO: JP15.3 S3.6 U2.A1
A1/SW_TXO1: JP41.3 S6.6 U4.A1
A1/SW_TXO2: JP66.3 S10.6 U7.A1
A1/SW_TXO3: JP91.3 S14.6 U10.A1
A2: JP16.3 U2.A2
A3: JP17.3 U2.A3
A4: JP18.3 SJ3.3 U2.A4
A5: JP19.3 SJ4.3 U2.A5
A6: JP44.3 SJ1.3 U4.A4
A7: JP42.3 U4.A2
A8: JP43.3 U4.A3
A9: JP70.3 SJ8.3 U7.A5
A10: JP69.3 SJ7.3 U7.A4
A11: JP67.3 U7.A2
A12: JP68.3 U7.A3
A13: JP95.3 SJ11.3 U10.A5
A14: JP94.3 SJ10.3 U10.A4
A15: JP92.3 U10.A2
A16: JP93.3 U10.A3
AIN1: JP4.3 TP1.P$1 U2.D4 U3.21
AIN2: JP5.3 TP2.P$1 U2.D5 U3.22
AIN3: JP31.3 TP14.P$1 U4.D5 U5.22
AIN4: JP30.3 TP13.P$1 U4.D4 U5.21
AIN5: JP56.3 TP26.P$1 U7.D5 U8.22
AIN6: JP55.3 TP25.P$1 U7.D4 U8.21
AIN7: JP81.3 TP38.P$1 U10.D5 U11.22
AIN8: JP80.3 TP37.P$1 U10.D4 U11.21
ANALOG_PWR_RAIL: JP14.2 JP15.2 JP16.2 JP17.2 JP18.2 JP19.2 S2.2 S2.5
ANALOG_PWR_RAIL1: JP40.2 JP41.2 JP42.2 JP43.2 JP44.2 JP45.2 S8.2 S8.5
ANALOG_PWR_RAIL2: JP65.2 JP66.2 JP67.2 JP68.2 JP69.2 JP70.2 S12.2 S12.5
ANALOG_PWR_RAIL3: JP90.2 JP91.2 JP92.2 JP93.2 JP94.2 JP95.2 S16.2 S16.5
AOUT1: JP21.4 JP22.4 R1.2 R2.2 U3.1 U3.2
AOUT2: D4.A D5.C JP21.3 JP22.3 U3.5 U3.6
AOUT3: JP25.4 JP46.4 R14.2 R15.2 U5.1 U5.2
AOUT4: D9.C D11.A JP25.3 JP46.3 U5.5 U5.6
AOUT5: JP50.4 JP71.4 R27.2 R28.2 U8.1 U8.2
AOUT6: D17.C D19.A JP50.3 JP71.3 U8.5 U8.6
AOUT7: JP75.4 JP96.4 R40.2 R41.2 U11.1 U11.2
AOUT8: D25.C D27.A JP75.3 JP96.3 U11.5 U11.6
BIN1: JP7.3 TP4.P$1 U2.D7 U3.17
BIN2: JP8.3 TP5.P$1 U2.D8 U3.16
BIN3: JP33.3 TP16.P$1 U4.D7 U5.17
BIN4: JP34.3 TP17.P$1 U4.D8 U5.16
BIN5: JP58.3 TP28.P$1 U7.D7 U8.17
BIN6: JP59.3 TP29.P$1 U7.D8 U8.16
BIN7: JP83.3 TP40.P$1 U10.D7 U11.17
BIN8: JP84.3 TP41.P$1 U10.D8 U11.16
BOUT1: JP21.2 JP22.2 R3.2 R4.2 U3.11 U3.12
BOUT2: D6.A D7.C JP21.1 JP22.1 U3.7 U3.8
BOUT3: D10.C D12.A JP25.1 JP46.1 U5.7 U5.8
BOUT4: JP25.2 JP46.2 R16.2 R17.2 U5.11 U5.12
BOUT5: D18.C D20.A JP50.1 JP71.1 U8.7 U8.8
BOUT6: JP50.2 JP71.2 R29.2 R30.2 U8.11 U8.12
BOUT7: D26.C D28.A JP75.1 JP96.1 U11.7 U11.8
BOUT8: JP75.2 JP96.2 R42.2 R43.2 U11.11 U11.12
D0/RXI: JP0.3 S3.1 U2.RX
D0/RXI1: JP26.3 S6.1 U4.RX
D0/RXI2: JP51.3 S10.1 U7.RX
D0/RXI3: JP76.3 S14.1 U10.RX
D1: JP38.3 U4.D12
D1/TXO: JP1.3 S3.4 U2.TX
D1/TXO1: JP27.3 S6.4 U4.TX
D1/TXO2: JP52.3 S10.4 U7.TX
D1/TXO3: JP77.3 S14.4 U10.TX
D2: JP2.3 U2.D2
D3: D13.A JP39.3 TP19.P$1 U4.D13
D4: JP36.3 U4.D10
D5: JP28.3 U4.D2
D6: JP37.3 U4.D11
D7: JP35.3 U4.D9
D8: JP63.3 U7.D12
D9: JP9.3 U2.D9
D10: JP10.3 U2.D10
D11: JP11.3 U2.D11
D12: JP12.3 U2.D12
D13: D8.A JP13.3 TP7.P$1 U2.D13
D14: D21.A JP64.3 TP31.P$1 U7.D13
D15: JP61.3 U7.D10
D16: JP53.3 U7.D2
D17: JP62.3 U7.D11
D18: JP60.3 U7.D9
D19: JP88.3 U10.D12
D20: D29.A JP89.3 TP43.P$1 U10.D13
D21: JP86.3 U10.D10
D22: JP78.3 U10.D2
D23: JP87.3 U10.D11
D24: JP85.3 U10.D9
DIN: D2.C Q1.2 R9.1 U1.3
DIN1: D15.C Q3.2 R22.1 U6.3
DIN2: D23.C Q5.2 R35.1 U9.3
DIN3: D31.C Q7.2 R48.1 U12.3
DIO0: JP24.3 U1.20
DIO1: JP24.2 U1.19
DIO2: JP48.2 U6.7
DIO3: JP49.3 U6.20
DIO4: JP49.2 U6.19
DIO5: JP73.2 U9.7
DIO6: JP74.3 U9.20
DIO7: JP74.2 U9.19
DIO8: JP98.2 U12.7
DIO9: JP99.3 U12.20
DIO10: JP99.2 U12.19
DIO11: JP23.2 U1.7
DOUT: D1.C Q2.2 R12.1 U1.2
DOUT1: D14.C Q4.2 R24.1 U6.2
DOUT2: D22.C Q6.2 R37.1 U9.2
DOUT3: D30.C Q8.2 R50.1 U12.2
FUSED_3.3V: F3.2 JP20.2 Q1.1 Q2.1 R6.1 R7.1 R9.2 R11.2 R12.2 U1.1
FUSED_3.3V1: F6.2 JP47.2 Q3.1 Q4.1 R19.1 R20.1 R22.2 R24.2 R26.2 U6.1
FUSED_3.3V2: F9.2 JP72.2 Q5.1 Q6.1 R32.1 R33.1 R35.2 R37.2 R39.2 U9.1
FUSED_3.3V3: F12.2 JP97.2 Q7.1 Q8.1 R45.1 R46.1 R48.2 R50.2 R52.2 U12.1
FUSED_5V: C2.1 F2.2 R10.2 R13.2 S1.3 S1.6 S2.3 S2.6 U3.19 U3.20
FUSED_5V1: C5.1 F5.2 R23.2 R25.2 S7.3 S7.6 S8.3 S8.6 U5.19 U5.20
FUSED_5V2: C8.1 F8.2 R36.2 R38.2 S11.3 S11.6 S12.3 S12.6 U8.19 U8.20
FUSED_5V3: C11.1 F11.2 R49.2 R51.2 S15.3 S15.6 S16.3 S16.6 U11.19 U11.20
FUSED_VIN: C1.1 C4.A F1.2 S1.1 S1.4 S2.1 S2.4 U3.13 U3.14 U3.24
FUSED_VIN1: C3.1 C6.A F4.2 S7.1 S7.4 S8.1 S8.4 U5.13 U5.14 U5.24
FUSED_VIN2: C7.1 C9.A F7.2 S11.1 S11.4 S12.1 S12.4 U8.13 U8.14 U8.24
FUSED_VIN3: C10.1 C12.A F10.2 S15.1 S15.4 S16.1 S16.4 U11.13 U11.14 U11.24
GND: C1.2 C2.2 C4.C D3.C JP0.1 JP1.1 JP2.1 JP3.1 JP4.1 JP5.1 JP6.1 JP7.1 JP8.1 JP9.1 JP10.1 JP11.1 JP12.1 JP13.1 JP14.1 JP15.1 JP16.1 JP17.1 JP18.1 JP19.1 JP20.1 JP23.1 JP24.1 R5.1 S4.1 S4.2 SJ5.2 TP9.P$1 U1.10 U2.GND@0 U2.GND@1 U2.GND@2 U3.3 U3.4 U3.9 U3.10 U3.18
GND1: C3.2 C5.2 C6.C D16.C JP26.1 JP27.1 JP28.1 JP29.1 JP30.1 JP31.1 JP32.1 JP33.1 JP34.1 JP35.1 JP36.1 JP37.1 JP38.1 JP39.1 JP40.1 JP41.1 JP42.1 JP43.1 JP44.1 JP45.1 JP47.1 JP48.1 JP49.1 R18.1 S5.1 S5.2 SJ6.2 TP21.P$1 U4.GND@0 U4.GND@1 U4.GND@2 U5.3 U5.4 U5.9 U5.10 U5.18 U6.10
GND2: C7.2 C8.2 C9.C D24.C JP51.1 JP52.1 JP53.1 JP54.1 JP55.1 JP56.1 JP57.1 JP58.1 JP59.1 JP60.1 JP61.1 JP62.1 JP63.1 JP64.1 JP65.1 JP66.1 JP67.1 JP68.1 JP69.1 JP70.1 JP72.1 JP73.1 JP74.1 R31.1 S9.1 S9.2 SJ9.2 TP33.P$1 U7.GND@0 U7.GND@1 U7.GND@2 U8.3 U8.4 U8.9 U8.10 U8.18 U9.10
GND3: C10.2 C11.2 C12.C D32.C JP76.1 JP77.1 JP78.1 JP79.1 JP80.1 JP81.1 JP82.1 JP83.1 JP84.1 JP85.1 JP86.1 JP87.1 JP88.1 JP89.1 JP90.1 JP91.1 JP92.1 JP93.1 JP94.1 JP95.1 JP97.1 JP98.1 JP99.1 R44.1 S13.1 S13.2 SJ12.2 TP45.P$1 U10.GND@0 U10.GND@1 U10.GND@2 U11.3 U11.4 U11.9 U11.10 U11.18 U12.10
N$1: D8.C R5.2
N$2: D9.A R14.1
N$3: D5.A R2.1
N$4: D11.C R15.1
N$5: D4.C R1.1
N$8: D7.A R4.1
N$9: D6.C R3.1
N$10: D10.A R16.1
N$11: D12.C R17.1
N$12: D13.C R18.2
N$13: D14.A R19.2
N$14: D15.A R20.2
N$15: D16.A R21.1
N$16: D17.A R27.1
N$17: D19.C R28.1
N$18: D18.A R29.1
N$19: D20.C R30.1
N$20: D21.C R31.2
N$21: D22.A R32.2
N$22: D1.A R6.2
N$23: D23.A R33.2
N$24: D24.A R34.1
N$25: D25.A R40.1
N$26: D27.C R41.1
N$27: D26.A R42.1
N$28: D28.C R43.1
N$29: D29.C R44.2
N$30: D30.A R45.2
N$31: D31.A R46.2
N$32: D32.A R47.1
N$43: D2.A R7.2
N$44: D3.A R8.1
PWMA: JP3.3 TP3.P$1 U2.D3 U3.23
PWMA1: JP29.3 TP15.P$1 U4.D3 U5.23
PWMA2: JP54.3 TP27.P$1 U7.D3 U8.23
PWMA3: JP79.3 TP39.P$1 U10.D3 U11.23
PWMB: JP6.3 TP6.P$1 U2.D6 U3.15
PWMB1: JP32.3 TP18.P$1 U4.D6 U5.15
PWMB2: JP57.3 TP30.P$1 U7.D6 U8.15
PWMB3: JP82.3 TP42.P$1 U10.D6 U11.15
PWR_RAIL: JP0.2 JP1.2 JP2.2 JP3.2 JP4.2 JP5.2 JP6.2 JP7.2 JP8.2 JP9.2 JP10.2 JP11.2 JP12.2 JP13.2 S1.2 S1.5
PWR_RAIL1: JP26.2 JP27.2 JP28.2 JP29.2 JP30.2 JP31.2 JP32.2 JP33.2 JP34.2 JP35.2 JP36.2 JP37.2 JP38.2 JP39.2 S7.2 S7.5
PWR_RAIL2: JP51.2 JP52.2 JP53.2 JP54.2 JP55.2 JP56.2 JP57.2 JP58.2 JP59.2 JP60.2 JP61.2 JP62.2 JP63.2 JP64.2 S11.2 S11.5
PWR_RAIL3: JP76.2 JP77.2 JP78.2 JP79.2 JP80.2 JP81.2 JP82.2 JP83.2 JP84.2 JP85.2 JP86.2 JP87.2 JP88.2 JP89.2 S15.2 S15.5
RESET: S4.3 S4.4 TP12.P$1 U2.RES
RESET1: S5.3 S5.4 TP24.P$1 U4.RES
RESET2: S9.3 S9.4 TP36.P$1 U7.RES
RESET3: S13.3 S13.4 TP48.P$1 U10.RES
RSSI: JP23.3 R8.2 U1.6
RSSI1: JP48.3 R21.2 U6.6
RSSI2: JP73.3 R34.2 U9.6
RSSI3: JP98.3 R47.2 U12.6
SCL: SJ4.1 U2.SCL
SCL1: SJ2.1 U4.SCL
SCL2: SJ8.1 U7.SCL
SCL3: SJ11.1 U10.SCL
SCL_I2C_PORT: JP20.4 SJ4.2
SCL_I2C_PORT1: JP47.4 SJ2.2
SCL_I2C_PORT2: JP72.4 SJ8.2
SCL_I2C_PORT3: JP97.4 SJ11.2
SDA: SJ3.1 U2.SDA
SDA1: SJ1.1 U4.SDA
SDA2: SJ7.1 U7.SDA
SDA3: SJ10.1 U10.SDA
SDA_I2C_PORT: JP20.3 SJ3.2
SDA_I2C_PORT1: JP47.3 SJ1.2
SDA_I2C_PORT2: JP72.3 SJ7.2
SDA_I2C_PORT3: JP97.3 SJ10.2
VIN: F1.1 TP10.P$1 U2.VIN
VIN1: F4.1 TP22.P$1 U4.VIN
VIN2: F7.1 TP34.P$1 U7.VIN
VIN3: F10.1 TP46.P$1 U10.VIN
XBEE_RESET: R11.1 SJ5.1 U1.5
XBEE_RESET1: R26.1 SJ6.1 U6.5
XBEE_RESET2: R39.1 SJ9.1 U9.5
XBEE_RESET3: R52.1 SJ12.1 U12.5
XBEE_RXI: Q2.3 R13.1 S3.2
XBEE_RXI1: Q4.3 R25.1 S6.2
XBEE_RXI2: Q6.3 R38.1 S10.2
XBEE_RXI3: Q8.3 R51.1 S14.2
XBEE_TXO: Q1.3 R10.1 S3.5
XBEE_TXO1: Q3.3 R23.1 S6.5
XBEE_TXO2: Q5.3 R36.1 S10.5
XBEE_TXO3: Q7.3 R49.1 S14.5